# Altium PCB PCB1.PcbDoc
Units mil, origin at the board's own origin, x right, y up, seen from the top; angles counter-clockwise.
Board outline 1865 x 1440 mil, 2 copper layers (Top Layer, Bottom Layer); 37 components, 18 nets, 83 pads, 62 vias.
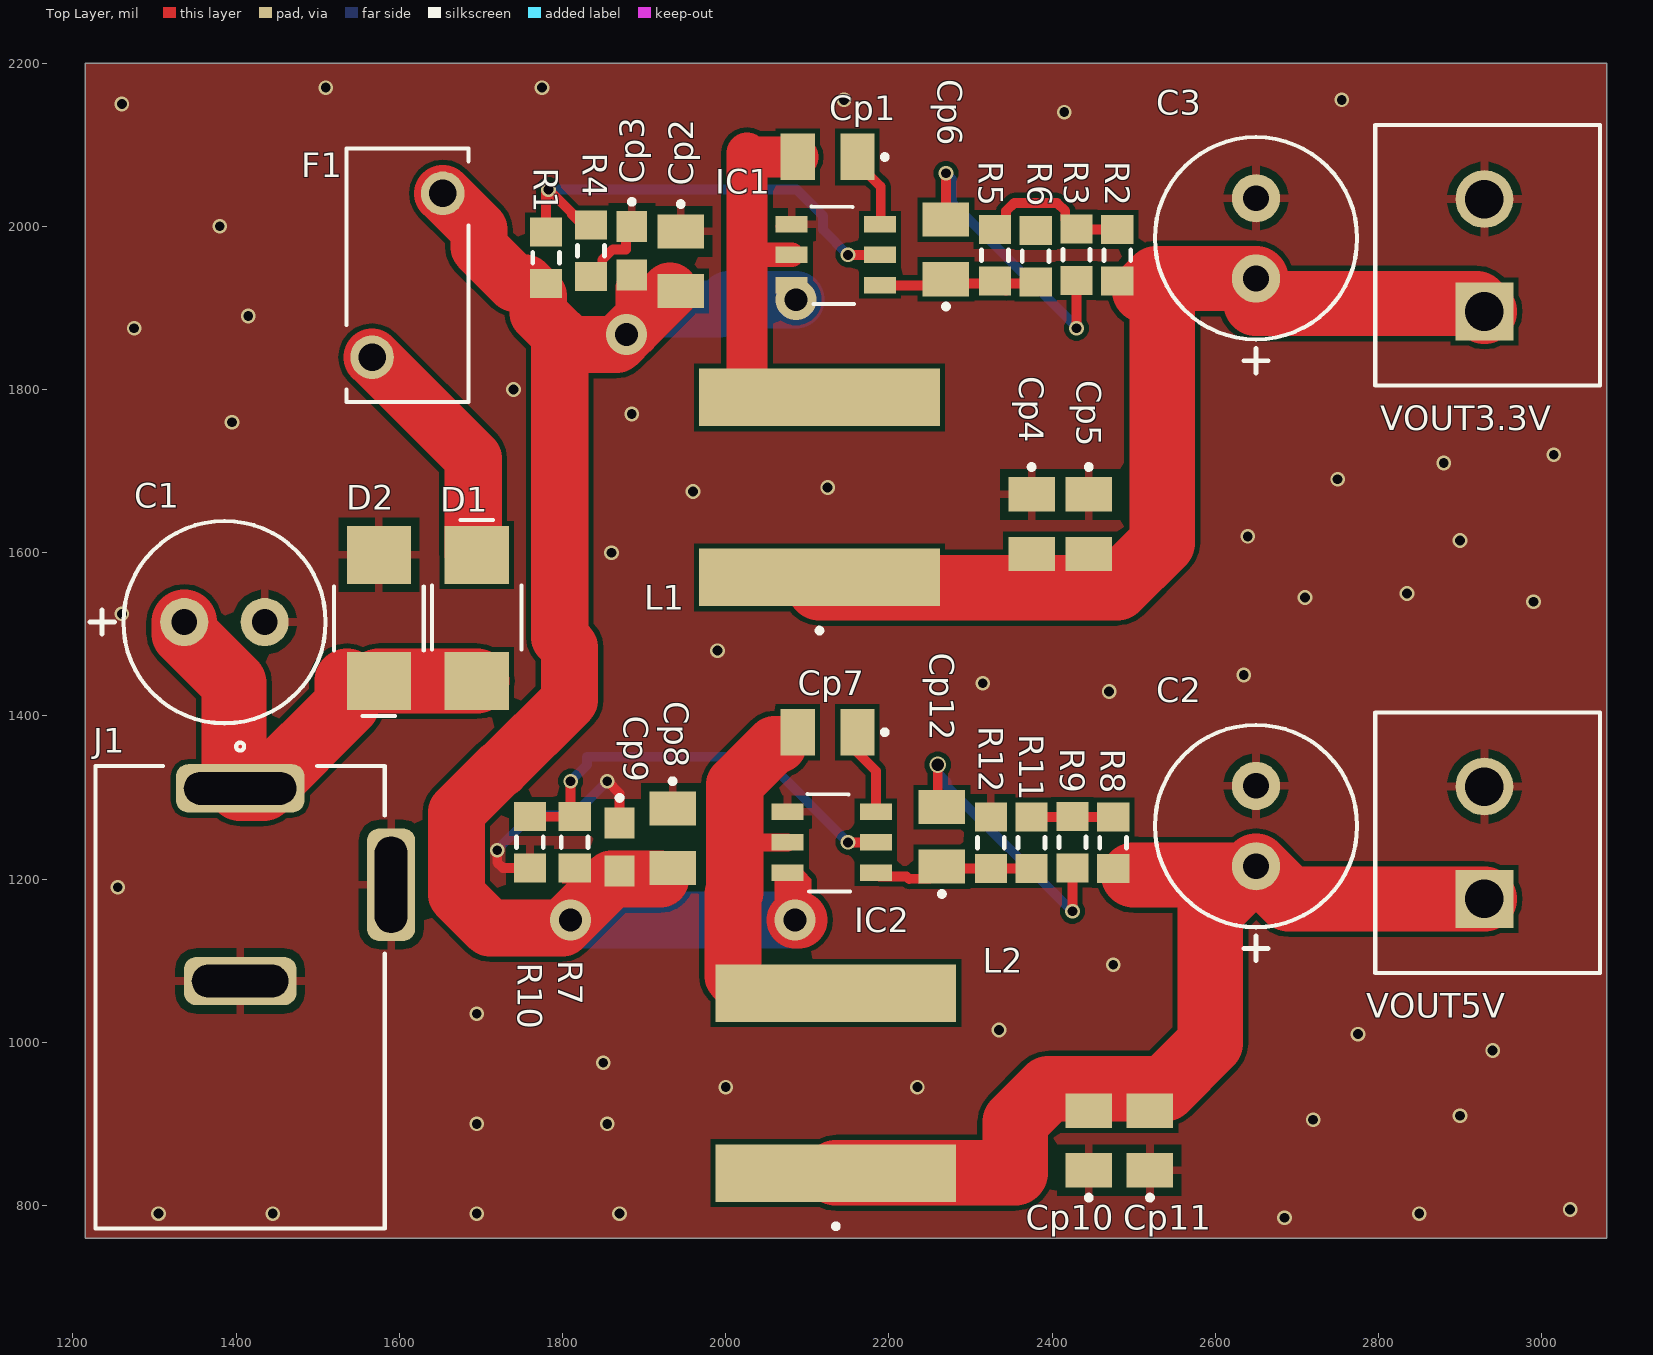
[diagram p0: Top Layer view]
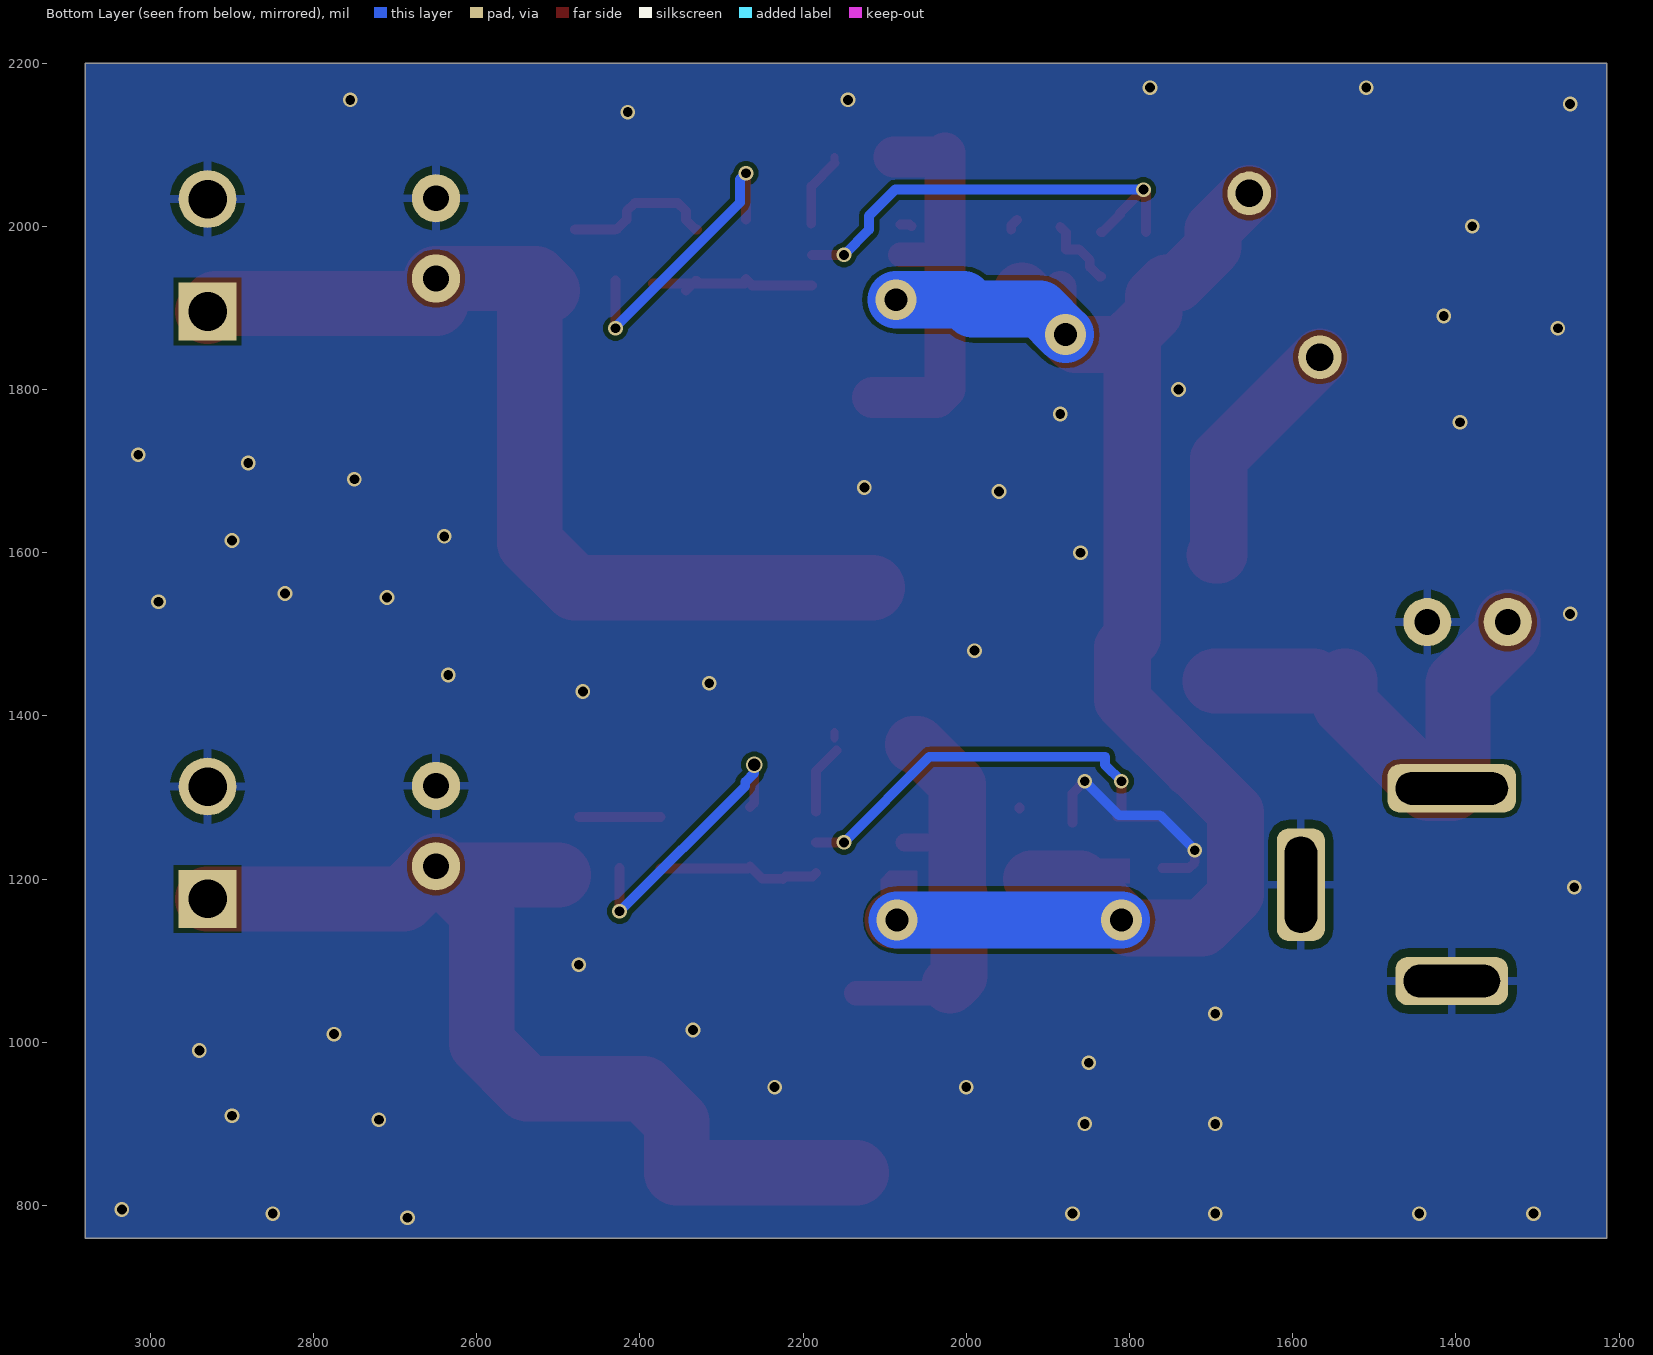
[diagram p1: Bottom Layer view, seen from below]
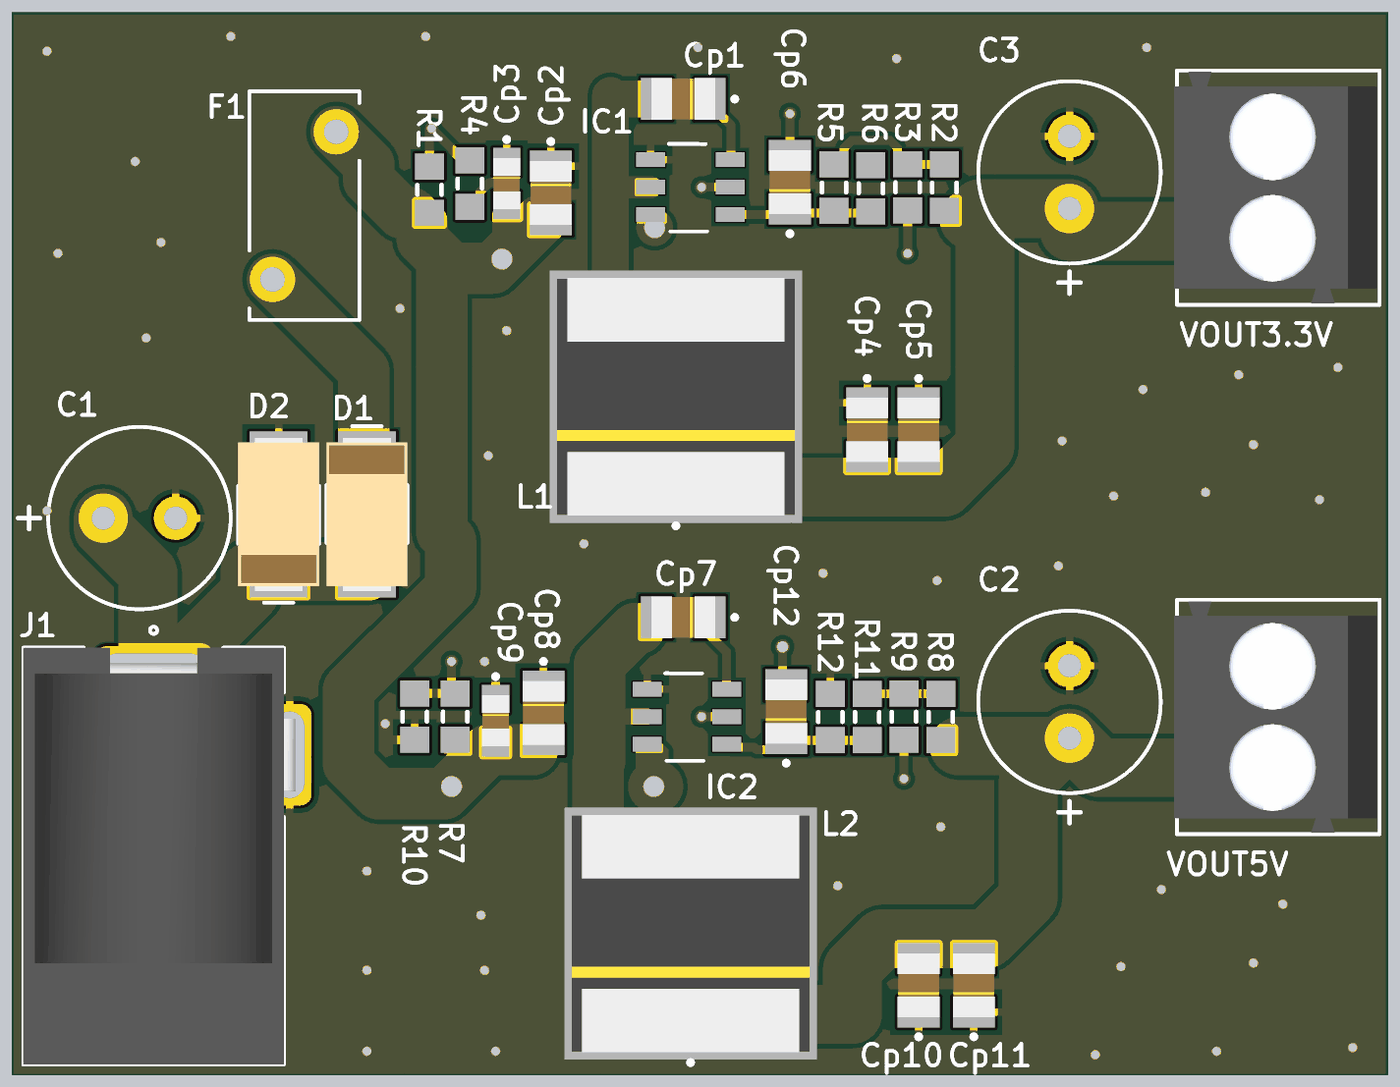
[diagram p2: 3D render of the assembled board from above, using the file's embedded part models]

## Layer stack, top to bottom
Top Solder: solder mask 0.4, Solder Resist, Dk 3.5
Top Layer: signal copper 1.4
Dielectric 1: dielectric 12.6, FR-4, Dk 4.8
Bottom Layer: signal copper 1.4
Bottom Solder: solder mask 0.4, Solder Resist, Dk 3.5

## Board outline
1215,760 3080,760 3080,2200 2914.99,2200 1781.66,2200 1215,2200

## Design rules (kind name [scope] priority, off if disabled: settings)
Clearance [All] p1: gap=6 ignorepadtopadclearanceinfootprint=TRUE
HoleSize [All] p1: absolutevalues=TRUE maxlimit=100 minlimit=12 maxpercent=80.000 minpercent=20.000
HoleToHoleClearance [All] p1: gap=5 allowstackedmicrovias=TRUE
MinimumSolderMaskSliver [All] p1: minsoldermaskwidth=2
PolygonConnect PolygonConnect_Via [IsVia] p1: connectstyle=Direct reliefconductorwidth=10 reliefentries=4 polygonreliefangle="90 Angle" airgapwidth=10
PolygonConnect [All] p2: connectstyle=Relief reliefconductorwidth=10 reliefentries=4 polygonreliefangle="90 Angle" airgapwidth=10
RoutingVias [All] p1: holewidth=12 width=18 viastyle="Through Hole" minholewidth=12 minwidth=18 maxholewidth=50 maxwidth=100
SilkToSilkClearance [All] p1: silktosilkclearance=1
SilkToSolderMaskClearance [IsPad] p1: minsilkscreentomaskgap=1 clearancetoexposedcopper=TRUE
SolderMaskExpansion [All] p1: expansion=4 istentingtop=FALSE
SupplyNets "Schematic Supply Nets_3" [InNet('3.3V')] p1: voltage=0.000
SupplyNets "Schematic Supply Nets_2" [InNet('12V')] p2: voltage=0.000
SupplyNets "Schematic Supply Nets_1" [InNet('5V')] p3: voltage=0.000
SupplyNets "Schematic Supply Nets" [InNet('GND')] p4: voltage=0.000
Width [All] p1: maxlimit=80 minlimit=10 preferedwidth=10
25 further rules are at their usual default settings.

## Components (designator, comment, footprint, x,y, rotation, side; value= is the part's Value field where it differs from the comment)
C1 "100uF 35V" CAP_TH_2.5MM_6.3*12MM 1385.79,1515 r0 top value=100uF
C2 "100uF 35V" CAP_TH_2.5MM_6.3*12MM 2650,1265 r90 top value=100uF
C3 "100uF 35V" CAP_TH_2.5MM_6.3*12MM 2650,1985.27 r90 top value=100uF
Cp1 "10uf 0805" Capacitor_0805 2125,2085 r180 top value=10uf
Cp2 "10uf 0805" Capacitor_0805 1945,1957.28 r270 top value=10uf
Cp3 "0.1uf 0603" Capacitor_0603 1885,1970 r270 top value="0.1 uf"
Cp4 "22uf 0805" Capacitor_0805 2375,1635 r270 top value=22uf
Cp5 "22uf 0805" Capacitor_0805 2445,1635 r270 top value=22uf
Cp6 "75pf 0805" Capacitor_0805 2270,1971.78 r90 top value=75pf
Cp7 "10uf 0805" Capacitor_0805 2125,1380 r180 top value=10uf
Cp8 "10uf 0805" Capacitor_0805 1935,1250 r270 top value=10uf
Cp9 "0.1uf 0603" Capacitor_0603 1870,1239.5 r270 top value="0.1 uf"
Cp10 "22uf 0805" Capacitor_0805 2445,879.61 r90 top value=22uf
Cp11 "22uf 0805" Capacitor_0805 2520,879.61 r90 top value=22uf
Cp12 "75pf 0805" Capacitor_0805 2265,1251.78 r90 top value=75pf
D1 "30V 3A" SMA 1695,1520 r270 top (schematic designator 1)
D2 "30V 3A" SMA 1575,1520 r90 top (schematic designator 2)
F1 "FUSE_RESET_120V_3A" FUS_RES_120V_3A 1610,1940 r270 top
IC1 "IC_TPS54308DDCR" IC_TPS54308DDCR 2135,1965 r0 top
IC2 "IC_TPS54308DDCR" IC_TPS54308DDCR 2130,1245 r0 top
J1 "PWR JACK 2.1mm" CON_POWER_BARREL_2.1MM_3CONN 1405,1193.11 r0 top
L1 "IND 10UH 3.1A" Inductor_10uh_3.1A 2115,1680 r90 top
L2 "IND 15UH 3.1A" Inductor_10uh_3.1A 2135,950 r90 top
R1 "511K 0603" 0603_resistor 1780,1961.5 r270 top value=511k
R2 "49.9 0603" 0603_resistor 2480,1964.53 r270 top value=49.9
R3 "2K 0603" 0603_resistor 2430,1965 r90 top value=2k
R4 "105K 0603" 0603_resistor 1835,1970 r90 top value=105k
R5 "100K 0603" 0603_resistor 2330,1964.53 r90 top value=100K
R6 "22K.1 0603" 0603_resistor 2380,1963.5 r270 top value=22K.1
R7 "511K 0603" 0603_resistor 1815,1245 r270 top value=511k
R8 "49.9 0603" 0603_resistor 2475,1244.53 r270 top value=49.9
R9 "2K 0603" 0603_resistor 2425,1245 r90 top value=2k
R10 "105K 0603" 0603_resistor 1760,1245 r90 top value=105k
R11 "100K 0603" 0603_resistor 2375,1244.53 r90 top value=100K
R12 "13K.3 0603" 0603_resistor 2325,1244.53 r270 top value=13K.3
VOUT3.3V "TERM BLK 2POS" TERM_BLK_2POS 2930,1964.53 r90 top (schematic designator TERM2)
VOUT5V "TERM BLK 2POS" TERM_BLK_2POS 2930,1244.53 r90 top (schematic designator TERM1)

## Footprints (in the part's own frame and the unit in brackets; to place one, negate y for a bottom-side part, rotate by r counter-clockwise, add the part's x,y. Pads: shape width x height; smd on the part's side, far side on the other; paste and mask are expansions set on the pad)
0603_resistor [mm]
  rect 0.9x1 smd: 1(-0.8,0) 2(0.8,0)
  silkscreen extent -0.16,-0.42 0.16,0.42, body extent -0.84,-1.27 1.11,0.42, height 0.8
CAP_TH_2.5MM_6.3*12MM [mm]
  round 1.5 hole 0.8: 1(-1.25,0) 2(1.25,0)
  silkscreen extent -4.19,-3.15 3.15,3.15, body extent -3.15,-3.15 3.15,3.15, height 12
Capacitor_0603 [mil]
  rect 38x37 smd: 1(-29.5,0) 2(29.5,0)
  silkscreen extent -63,-3 -57,3, body extent -34,-19 34,19, height 37
Capacitor_0805 [mil]
  rect 42x57 smd: 1(-36.5,0) 2(36.5,0)
  silkscreen extent -73,-3 -67,3, body extent -44,-29 44,29, height 57
CON_POWER_BARREL_2.1MM_3CONN [mm]
  rrect50% 4x1.5 hole 1.016 slot 3.5 at 0 deg: 1(0,3)
  rrect50% 3.5x1.5 hole 1.016 slot 3 at 0 deg: 2(0,-3)
  rrect50% 1.5x3.5 hole 1.016 slot 3 at 90 deg: 3(4.7,0)
  silkscreen extent -4.5,-10.7 4.5,4.42, body extent -4.5,-10.7 4.9,3.7, height 11
FUS_RES_120V_3A [mm]
  round 1.358 hole 0.85 mask+0.102: 1(-2.55,1.1) 2(2.55,-1.1)
  silkscreen extent -3.95,-1.9 3.95,1.9
IC_TPS54308DDCR [mm]
  rect 1x0.508 smd paste+0 mask+0.051: 1(-1.375,0.95) 2(-1.375,0) 3(-1.375,-0.95) 4(1.375,-0.95) 5(1.375,0) 6(1.375,0.95)
  silkscreen extent -0.75,-1.52 0.57,1.5
Inductor_10uh_3.1A [mil]
  rect 70.5x295 smd: 1(-110.25,0) 2(110.25,0)
  silkscreen extent -178,-3 -173,3, body extent -161,-162 161,162, height 165
SMA [mm]
  rect 1.8x2 smd: 1(-1.965,0) 2(1.965,0)
  silkscreen extent -3.05,-1.4 0.98,1.4, body extent -2.64,-1.4 2.64,1.4, height 2.34
TERM_BLK_2POS [mm]
  rect 1.8x1.8 / inner round 1.8 / far side rect 1.8x1.8 hole 1.2: 1(-1.75,0)
  round 1.8 hole 1.2: 2(1.75,0)
  silkscreen extent -4.05,-3.6 4.05,3.4, body extent -4,-3.5 4,3.5, height 8.4

## Part data
C1 C2 C3: library part Cap_100uF_ALU_TH_35V, "100uF 35V ±20% Plugin,D6.3xL12mm Aluminum Electrolytic Capacitors - Leaded ROHS", Manufacturer=HRK, Manufacturer Part Number="35V100uF CD110", Supplier Part Number 1=C2960381, ComponentLink1Description=LCSC, ComponentLink1URL=https://lcsc.com/product-detail/Aluminum-Electrolytic-Capacitors-Leaded_HRK-35V100uF-CD110_C2960381.html, Supplier 1=LCSC
Cp1 Cp2 Cp7 Cp8: library part Capacitor_10uf_0805_50V, "CAP CER 10UF 50V X5R 0805", Manufacturer="Murata Electronics", Manufacturer PN=GRM21BR61H106KE43L, Supplier Part Number 1=490-18663-1-ND, ComponentLink1Description=Link, ComponentLink1URL=https://www.digikey.com/en/products/detail/murata-electronics/GRM21BR61H106KE43L/10326316, Supplier 1=Digi-Key
Cp3 Cp9: library part Capacitor_0.1uf_0603_50V, "CAP CER 0.1UF 50V X7R 0603", Manufacturer="KYOCERA AVX", Manufacturer PN=CC0603KRX7R9BB104, Supplier Part Number 1=311-1344-1-ND, ComponentLink1Description=Link, ComponentLink1URL=https://www.digikey.com/en/products/detail/yageo/CC0603KRX7R9BB104/2103082, Supplier 1=Digi-Key
Cp4 Cp5 Cp10 Cp11: library part Capacitor_22uf_0805_50V_1, "CAP0805 X5R 22UF 20% 25V", Manufacturer="Cal-Chip Electronics, Inc.", Manufacturer PN=GMC21X5R226M25NT, Supplier Part Number 1=4713-GMC21X5R226M25NTCT-ND, ComponentLink1Description=Link, ComponentLink1URL=https://www.digikey.com/en/products/detail/cal-chip-electronics-inc/GMC21X5R226M25NT/18151071, Supplier 1=Digi-Key
Cp6 Cp12: library part Capacitor_75pf_0805_50V, "CAP CER 75PF 50V C0G/NPO 0805", Manufacturer=YAGEO, Manufacturer PN=CC0805JRNPO9BN750, Supplier Part Number 1=311-4243-1-ND, ComponentLink1Description=Link, ComponentLink1URL=https://www.digikey.com/en/products/detail/cal-chip-electronics-inc/GMC21X5R226M25NT/18151071, Supplier 1=Digi-Key
D1 D2: library part D_Schottky_40V_3A_SMA, "40V Independent 3A 550mV@3A SMA Schottky Diodes ROHS", Manufacturer=TDSEMIC, Manufacturer Part Number=SS34-TD, Supplier Part Number 1=C46550832, ComponentLink1Description=LCSC, ComponentLink1URL=https://lcsc.com/product-detail/Schottky-Diodes_TDSEMIC-SS34-TD_C46550832.html, Supplier 1=LCSC
F1: "PTC RESET FUSE 120V 300MA RADIAL", Manufacturer="Bel Fuse Inc.", Manufacturer PN=0ZRM0030FF1E, Supplier Part Number 1=5923-0ZRM0030FF1E-ND, ComponentLink1Description=Link, ComponentLink1URL=https://www.digikey.com/en/products/detail/bel-fuse-inc/0ZRM0030FF1E/1965823, Supplier 1=Digi-Key
IC1 IC2: "IC REG BUCK ADJ 3A SOT23", Manufacturer="Texas Instruments", Manufacturer PN=TPS54308DDCR, Supplier Part Number 1=296-47880-1-ND, ComponentLink1Description=Link, ComponentLink1URL=https://www.digikey.com/en/products/detail/texas-instruments/TPS54308DDCR/7400123, Supplier 1=Digi-Key
J1: library part Con_Power_Jack_2.1mm_3pins, "CONN PWR JACK 2X5.5MM SOLDER", Manufacturer=HCTL, Manufacturer Part Number=HC-DC-005-2.0T, Supplier Part Number 1=C3010533, ComponentLink1Description=LCSC, ComponentLink1URL=https://www.lcsc.com/product-detail/AC-DC-Power-Connectors_HCTL-HC-DC-005-2-0T_C3010533.html, Supplier 1=LCSC
L1: library part IND_10UH_3.1A, "FIXED IND 10UH 3.1A 44.2 MOHM", Manufacturer="Taiyo Yuden", Manufacturer PN=NRS8040T100MJGJ, Supplier Part Number 1=587-2972-1-ND, ComponentLink1Description=Link, ComponentLink1URL=https://www.digikey.com/en/products/detail/taiyo-yuden/NRS8040T100MJGJ/2666010, Supplier 1=Digi-Key
L2: library part IND_15UH_3.1A, "FIXED IND 15UH 3.1A 44 MOHM SMD", Manufacturer="Eaton - Electronics Division", Manufacturer PN=DRA124-150-R, Supplier Part Number 1=283-DRA124-150-RCT-ND, ComponentLink1Description=Link, ComponentLink1URL=N4IgjCBcpgnAHLKoDGUBmBDANgZwKYA0IA9lANogAMIAugL7EBMV8A7MiGpFnkaRXABWAAQBWgBJ1iABwAuUEAFUAdgEs5AeXQBZfJlwBXAE74QjEC3jxO3XgWJlIlAMwA6MCICC0kPMWqGtp6BiZmFgC0QrYYOA4CzpZ0kUjQXFByxob8Tq4gxBAMxBFMMZCZ2Y6C0Qz09EA, Supplier 1=Digi-Key
R1 R7: library part RES_511K_0603_1/10W_1%_1_1_1, "RES 511K OHM 1% 1/10W 0603", Manufacturer="Cal-Chip Electronics, Inc.", Manufacturer PN=RM06F5113CT, Supplier Part Number 1=4713-RM06F5113CT-ND, ComponentLink1Description=Link, ComponentLink1URL=https://www.digikey.com/en/products/detail/cal-chip-electronics-inc/RM06F5113CT/26811769, Supplier 1=Digi-Key
R2 R8: library part RES_49.9_0603_1/10W_1%, "RES 49.9 OHM 1% 1/10W 0603", Manufacturer=YAGEO, Manufacturer PN=RC0603FR-0749R9L, Supplier Part Number 1=311-49.9HRCT-ND, ComponentLink1Description=Link, ComponentLink1URL=https://www.digikey.com/en/products/detail/yageo/RC0603FR-0749R9L/727264, Supplier 1=Digi-Key
R3 R9: library part RES_2K_0603_1/10W_1%_1, "RES 2K OHM 1% 1/10W 0603", Manufacturer="NIC Components Corp", Manufacturer PN=NRC06F2001TRF, Supplier Part Number 1=4988-NRC06F2001TRFCT-ND, ComponentLink1Description=Link, ComponentLink1URL=https://www.digikey.com/en/products/detail/nic-components-corp/NRC06F2001TRF/18896030, Supplier 1=Digi-Key
R4 R10: library part RES_105K_0603_1/10W_1%_1_1, "RES 105K OHM 1% 1/10W 0603", Manufacturer="Cal-Chip Electronics, Inc.", Manufacturer PN=RM06F1053CT, Supplier Part Number 1=4713-RM06F1053CT-ND, ComponentLink1Description=Link, ComponentLink1URL=https://www.digikey.com/en/products/detail/cal-chip-electronics-inc/RM06F1053CT/26772973, Supplier 1=Digi-Key
R5 R11: library part RES_100K_0603_1/10W_1%_1, "RES 100K OHM 1% 1/10W 0603", Manufacturer=YAGEO, Manufacturer PN=RC0603FR-07100KL, Supplier Part Number 1=311-100KHRCT-ND, ComponentLink1Description=Link, ComponentLink1URL=https://www.digikey.com/en/products/detail/yageo/RC0603FR-07100KL/726889, Supplier 1=Digi-Key
R6: library part RES_22K.1_0603_1/10W_1%_1_1, "RES 22K.1 OHM 1% 1/10W 0603", Manufacturer=YAGEO, Manufacturer PN=RC0603FR-0722K1L, Supplier Part Number 1=311-22.1KHRCT-ND, ComponentLink1Description=Link, ComponentLink1URL=https://www.digikey.com/en/products/detail/yageo/RC0603FR-0722K1L/727058, Supplier 1=Digi-Key
R12: library part RES_13K.3_0603_1/10W_1%_, "RES 13.3K OHM 1% 1/10W 0603", Manufacturer="Stackpole Electronics Inc", Manufacturer PN=RMCF0603FT13K3, Supplier Part Number 1=RMCF0603FT13K3CT-ND, ComponentLink1Description=Link, ComponentLink1URL=https://www.digikey.com/en/products/detail/stackpole-electronics-inc/RMCF0603FT13K3/1761279, Supplier 1=Digi-Key
VOUT3.3V VOUT5V: library part TERM_BLK_2POS, "TERM BLK 2POS SIDE ENT 3.5MM PCB", Manufacturer="On Shore Technology Inc.", Manufacturer PN=OSTTE020104, Supplier Part Number 1=ED2740-ND, ComponentLink1Description=Link, ComponentLink1URL=https://www.digikey.com/en/products/detail/on-shore-technology-inc/OSTTE020104/2351816?s=N4IgTCBcDaIPYGcAuSCmAGM6CM6AsIAugL5A, Supplier 1=Digi-Key

## Via types
v1: diameter 18, hole 12, Top Layer to Bottom Layer, tented both sides, 57 vias
v2: diameter 50, hole 28, Top Layer to Bottom Layer, tented both sides, 4 vias
v3: diameter 20, hole 15, Top Layer to Bottom Layer, tented both sides, 1 vias

## Nets (pads, with @x,y where several pads share a name; then routed paths per layer and width w, separated by ;. In a path a pad name is that pad's centre, name@x,y a point inside that pad or via, vN(x,y) a via of type N, cw(c..) or ccw(c..) an arc to the next point about the centre after c; other vN are vias at no path point)
3.3V: C3.1 Cp4.2 Cp5.2 L1.1 R2.2 VOUT3.3V.1 | length 1172.2
  Top Layer w80: L1.1@2115,1557 2445,1557 2479.71,1557 2535,1612.29 2535,1915 ; 2513.5,1921.41 2528.15,1936.06 C3.1 ; 2650,1905.36 2920.27,1905.36 VOUT3.3V.1
5V: C2.1 Cp10.2 Cp11.2 L2.1 R8.2 VOUT5V.1 | length 1237.3
  Top Layer w80: L2.1 2135.25,840 2355,840 2355,902.32 2395.79,943.11 2538.14,943.11 2594.07,999.04 2594.07,1159.86 C2.1@2639.21,1205 ; 2500,1205 C2.1@2639.21,1205 ; VOUT5V.1 2690.16,1175.63 C2.1 C2.1@2639.21,1205
12V: Cp2.2 Cp3.2 Cp8.2 Cp9.2 F1.1 IC1.3 IC2.3 R1.2 R7.2 | length 2014.1
  Top Layer w40: v2@1885,1873.78 Cp3.2@1885,1925.5 ; Cp2.2@1932,1920.78 Cp2.2
  Top Layer w70: F1.1 1697.49,1996.21 1697.49,1974.46 1741.68,1930.28 1754.72,1930.28 1770.31,1914.69 1770.31,1893.64 1796.68,1867.28 1796.68,1496.01 1808.69,1483.99 1808.69,1419.3 1724.6,1335.21 1723.33,1335.21 1670,1281.88 1670,1181.01 1711.01,1140 1800,1140 v2(1810,1150) 1860,1200 Cp8.2@1920,1200 ; 1796.68,1855 1866.22,1855 1885,1873.78 Cp2.2@1932,1920.78 ; v2(2085,1150) v2@2090,1150
  Bottom Layer w70: v2(1810,1150) v2(2085,1150) ; v2(1878.51,1867.28) 1910,1898.78 1992.14,1898.78 2003.36,1910 v2(2086.18,1910)
GND: C1.2 C2.2 C3.2 Cp2.1 Cp3.1 Cp4.1 Cp5.1 Cp8.1 Cp9.1 Cp10.1 Cp11.1 D2.2 IC1.1 IC2.1 J1.2 J1.3 R4.1 R10.1 R12.1 VOUT3.3V.2 VOUT5V.2 | length 408.6
  Top Layer w12: v1(1720,1235.44) 1720,1220.53 1727.03,1213.5 R10.1 ; R4.1 1836.97,1938.5 1848.69,1950.22 1848.69,1958.66 1861.53,1971.5 1877.97,1971.5 1877.97,1992.47 Cp3.1 ; v1(1855,1320) 1870,1305 Cp9.1 ; Cp8.1 Cp8.1@1935,1287.72 ; Cp2.1@1938.08,2008.08 1945,2001.16 Cp2.1@1945,1995.78 ; IC1.1@2067.18,2000 2069.58,2002.4 IC1.1
  Bottom Layer w12: v1(1720,1235.44) 1762.86,1278.29 1813.29,1278.29 v1(1855,1320)
  other v1: 2685,785 1305,790 1445,790 1695,790 1870,790 2850,790 3035,795 1695,900 1855,900 2720,905 2900,910 2000,945 2235,945 1850,975 2940,990 2775,1010 2335,1015 1695,1035 2475,1095 1255,1190 2470,1430 2315,1440 2635,1450 1990,1480 1260,1525 2990,1540 2710,1545 2835,1550 1860,1600 2900,1615 2640,1620 1960,1675 2125,1680 2750,1690 2880,1710 3015,1720 1395,1760 1885,1770 1740,1800 1275,1875 1415,1890 1380,2000 2415,2140 1260,2150 2145,2155 2755,2155 1510,2170 1775,2170
NetC1_1: C1.1 D1.2 D2.1 J1.1 | length 554.3
  Top Layer w80: C1.1 1336.57,1500.96 1397.45,1440.08 1397.45,1318.77 J1.1 1433.27,1311.22 1535.96,1413.92 D2.1@1535.96,1442.64 ; D2.1 D1.2
NetCp1_1: Cp1.1 IC1.6 | length 93.6
  Top Layer w10: Cp1.1@2161.5,2077.5 Cp1.1
  Top Layer w12: Cp1.1@2161.5,2077.5 2190,2049 IC1.6@2190,2003.23
NetCp1_2: Cp1.2 IC1.2 L1.2 | length 490.5
  Top Layer w30: 2037.27,1965 IC1.2
  Top Layer w50: Cp1.2 2031.18,2085 2026.18,2090 2026.18,1800.5 2036.43,1790.25 L1.2
NetCp6_1: Cp6.1 IC1.4 R5.1 R6.2 | length 218.5
  Top Layer w12: IC1.4 2262.32,1927.6 Cp6.1 Cp6.1@2272.25,1933.03 ; Cp6.1@2271.12,1930 R6.2@2383.88,1930 ; R5.1 2331.97,1933.03 R5.1@2343.69,1921.31
NetCp6_2: Cp6.2 R3.1 | length 371.5
  Top Layer w12: Cp6.2 v1(2270,2065) ; v1(2430,1875) R3.1
  Bottom Layer w12: v1(2270,2065) 2277.27,2057.73 2277.27,2029.13 2430,1876.4 v1(2430,1875)
NetCp7_1: Cp7.1 IC2.6 | length 92.9
  Top Layer w10: Cp7.1@2161.5,1372.5 Cp7.1
  Top Layer w12: Cp7.1@2159.25,1357.5 2184.13,1332.62 IC2.6
NetCp7_2: Cp7.2 IC2.2 L2.2 | length 495.7
  Top Layer w22: 2025,1245 IC2.2
  Top Layer w30: L2.2@2020,1070 2030,1060 2115,1060 2115.25,1060.25 L2.2
  Top Layer w70: L2.2@2020,1070 2009,1081 2009,1181.48 2011.18,1183.66 2011.18,1245 2011.18,1316.03 2060.15,1365 2065,1365
NetCp12_1: Cp12.1 IC2.4 R11.1 R12.2 | length 201.3
  Top Layer w12: IC2.4 2188.55,1203.18 2221.82,1203.18 2225,1200 2225.28,1200.28 2250,1200.28 Cp12.1 2267.25,1213.03 R12.2 R11.1
NetCp12_2: Cp12.2 R9.1 | length 355.2
  Top Layer w12: v3(2260,1340) 2260,1293.28 Cp12.2 ; v1(2425,1160.47) R9.1
  Bottom Layer w12: v3(2260,1340) 2260,1329.72 2270.91,1318.81 2270.91,1314.09 v1@2425,1160
NetD1_1: D1.1 F1.2 | length 297.7
  Top Layer w70: F1.2 1690.63,1715.67 1690.63,1597.8 1691.06,1597.36 D1.1
NetIC1_5: IC1.5 R1.1 R4.2 | length 582
  Top Layer w12: R1.1 1780,2045 v1(1782.99,2045) 1811.69,2016.31 1811.69,2014.34 1833.03,1992.99 R4.2@1835,1992.99 ; v1(2150,1965) IC1.5
  Bottom Layer w12: v1@1780,2045 2087.11,2045 2119.14,2012.97 2119.14,1995.86 v1(2150,1965)
NetIC2_5: IC2.5 R7.1 R10.2 | length 535.5
  Top Layer w12: R10.2 R7.1@1814.05,1276.5 ; v1(1810,1320) 1810,1281.5 R7.1 ; v1(2150,1245) IC2.5
  Bottom Layer w12: v1(1810,1320) 1830,1340 1830,1350 2045,1350 v1(2150,1245)
NetR2_1: R2.1 R3.2 R5.2 | length 189.7
  Top Layer w12: R5.2 2331.97,1996.02 2343.69,2007.74 2343.69,2018.71 2353.69,2028.72 2406.31,2028.72 2416.31,2018.71 2416.31,2008.21 2428.03,1996.5 R3.2 2430.24,1996.26 2479.76,1996.26 R2.1
NetR8_1: R8.1 R9.2 R11.2 | length 100
  Top Layer w12: R11.2 2425,1276.02 R8.1
pads on no net: R6.1

## Polygon pours and split planes (outlines as drawn)
GND on Top Layer "GND_TOP" (solid, remove dead copper, pour order 0): 1215,759.61 3080,759.61 3080,2199.61 2914.99,2199.61 1781.66,2199.61 1215,2199.61
GND on Bottom Layer "GND_BOTTOM" (solid, remove dead copper, pour order 1): 1215,760 3080,760 3080,2200 2914.99,2200 1781.66,2200 1215,2200

## Other copper
Top Layer:
  region net 12V: 1840,1190 1835,1195 1800,1195 1800,1225 1840,1225 1840,1220 1860,1200
  region net 12V: 2065,1145 2060,1150 2060,1210 2095,1210 2105,1200 2105,1145

## Silkscreen, mask and mechanical layers (free items; w line width, h text height)
Board Shape:
  lines w6: 1781.66,2200 1215,2200 1215,760 3080,760 3080,2200 2914.99,2200 1781.66,2200 ; 1781.66,2200 1781.66,2200